# EAGLE board musb-input-breakout (EAGLE 9.0.1)
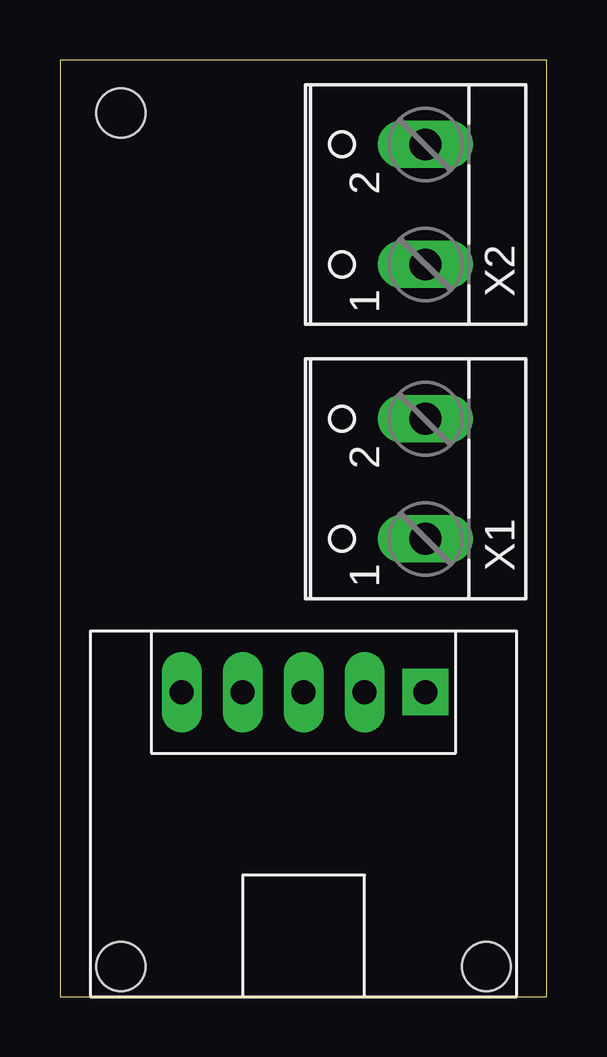
[diagram p0: board, top side]
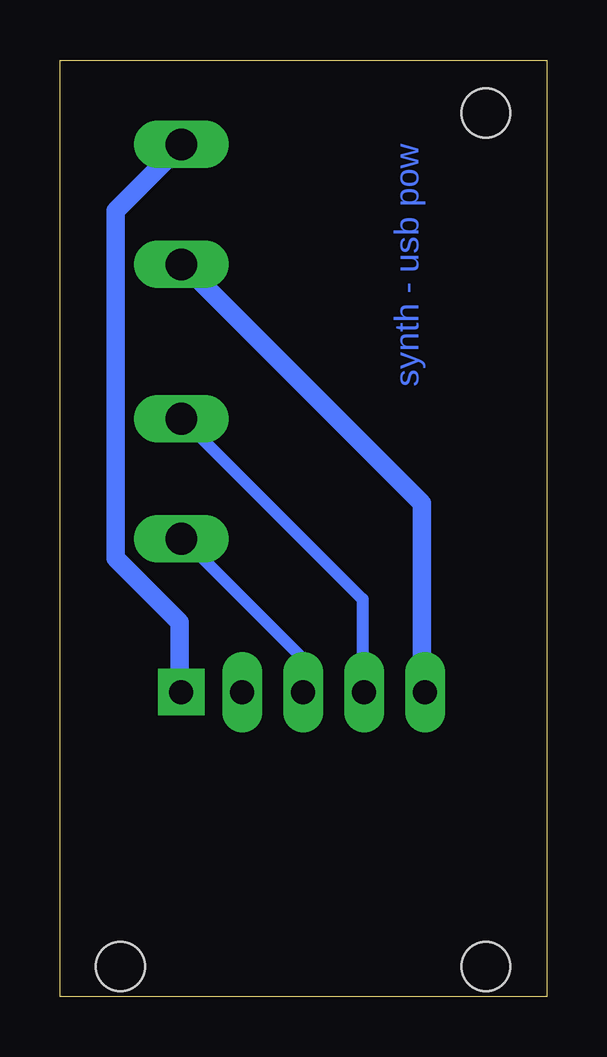
[diagram p1: board, bottom side, seen from below]

Size 20.3 x 39.04 mm. Coordinates in mm from the lower left corner, seen from the top.
Outline: 0,0 20.3,0 20.3,39.04 0,39.04 0,0
Copper layers (1*16): Top 0.035mm / dielectric 1.5mm / Bottom 0.035mm
Design rules "default": minimum track width 6mil, minimum drill 0.35mm, track to track 6mil, track to pad 6mil, pad to pad 6mil, via to via 6mil, smd to smd 6mil, copper to edge 40mil, drill to drill 6mil, minimum pad ring 10mil, minimum via ring 8mil, stop-mask expansion 4mil, vias tented up to drill 0mil, thermal gap 10mil
Net classes: 0 default: width 0.508 mm, clearance 0.254 mm; 1 power: width 0.762 mm, clearance 0.305 mm
Holes 2.03 mm at 2.54,1.27 17.78,1.27 2.54,36.83

## Footprints (pad centres in the part's own frame; a part is rotated, then mirrored left to right if it is on the bottom)
MICRO-USB = drill 1 pad 1.676 long: 5V 5.08,0; D+ 0,0; D- 2.54,0; ID -2.54,0 | drill 1 pad 1.93 square: GND -5.08,0
W237-102 = drill 1.321 long: 1 -2.5,-1.27; 2 2.5,-1.27

## Placement (x,y rotation side)
U$1  MICRO-USB  [MICRO-USB]  10.16,12.7 180 top
X1  [W237-102]  13.97,21.59 90 top
X2  [W237-102]  13.97,33.02 90 top

## Library data of the parts
U$1 = mask_lbr
X1 X2 = mask_lbr; MPN: 237-102; OC_FARNELL: unknown; OC_NEWARK: 70K9898

## Nets
N$1 [power]: U$1.GND X2.2
N$2 [power]: U$1.5V X2.1
N$3: U$1.D+ X1.1
N$4: U$1.D- X1.2

## Tracks (layer width: path | path; a pad name or v marks a point on that pad's centre or on a via)
N$1
  Bottom 0.762: U$1.GND 15.3,12.76 15.3,15.62 17.97,18.29 17.97,32.77 15.3,35.43 X2.2
N$2
  Bottom 0.762: U$1.5V 5.21,12.76 5.21,20.57 15.11,30.48 X2.1
N$3
  Bottom 0.508: U$1.D+ 10.16,14.1 15.11,19.05 X1.1
N$4
  Bottom 0.508: U$1.D- 7.68,12.76 7.68,16.57 15.11,24 X1.2

## Text on the board
Bottom: synth - usb pow